# Altium PCB KeyboardControl.PcbDoc
Units mm, origin at the board's own origin, x right, y up, seen from the top; angles counter-clockwise.
Board outline 68 x 22 mm, 2 copper layers (Top Layer, Bottom Layer), stack 1.4 mm thick; 18 components, 35 nets, 131 pads, 58 vias.
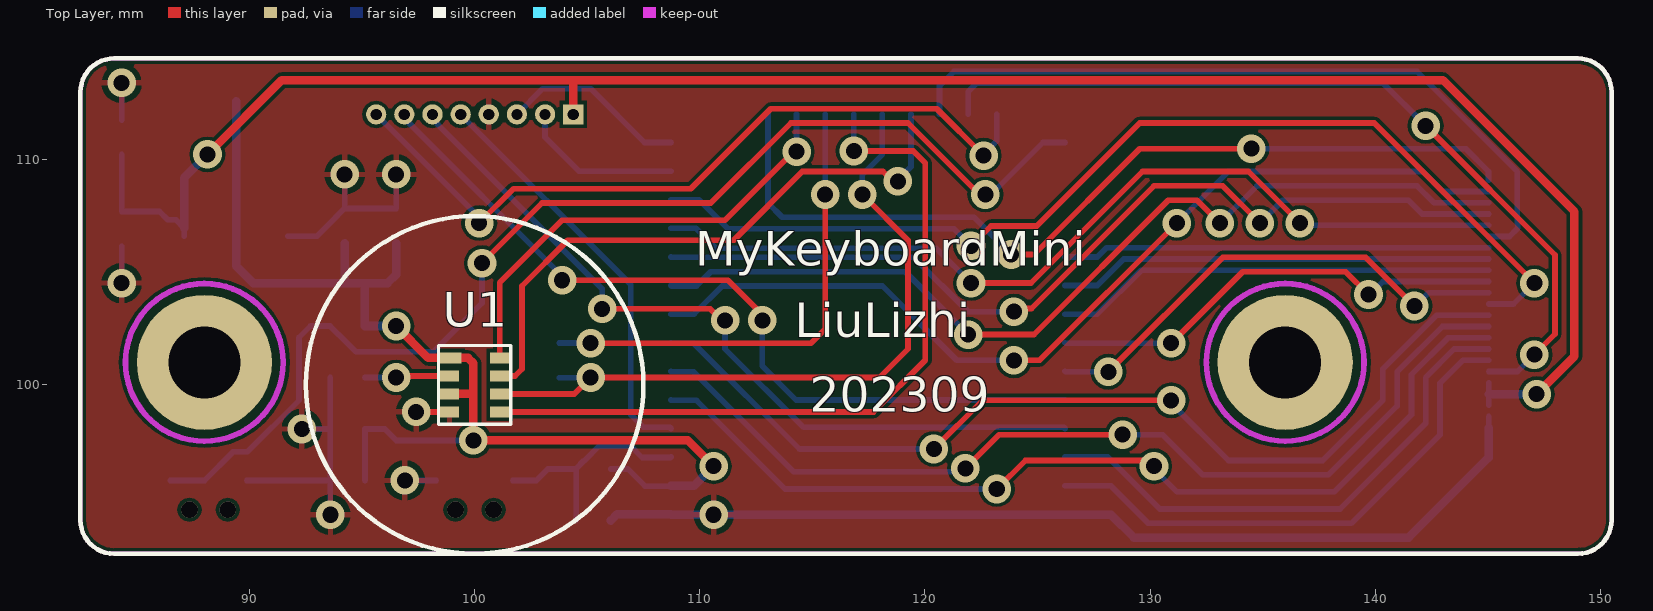
[diagram p0: Top Layer view]
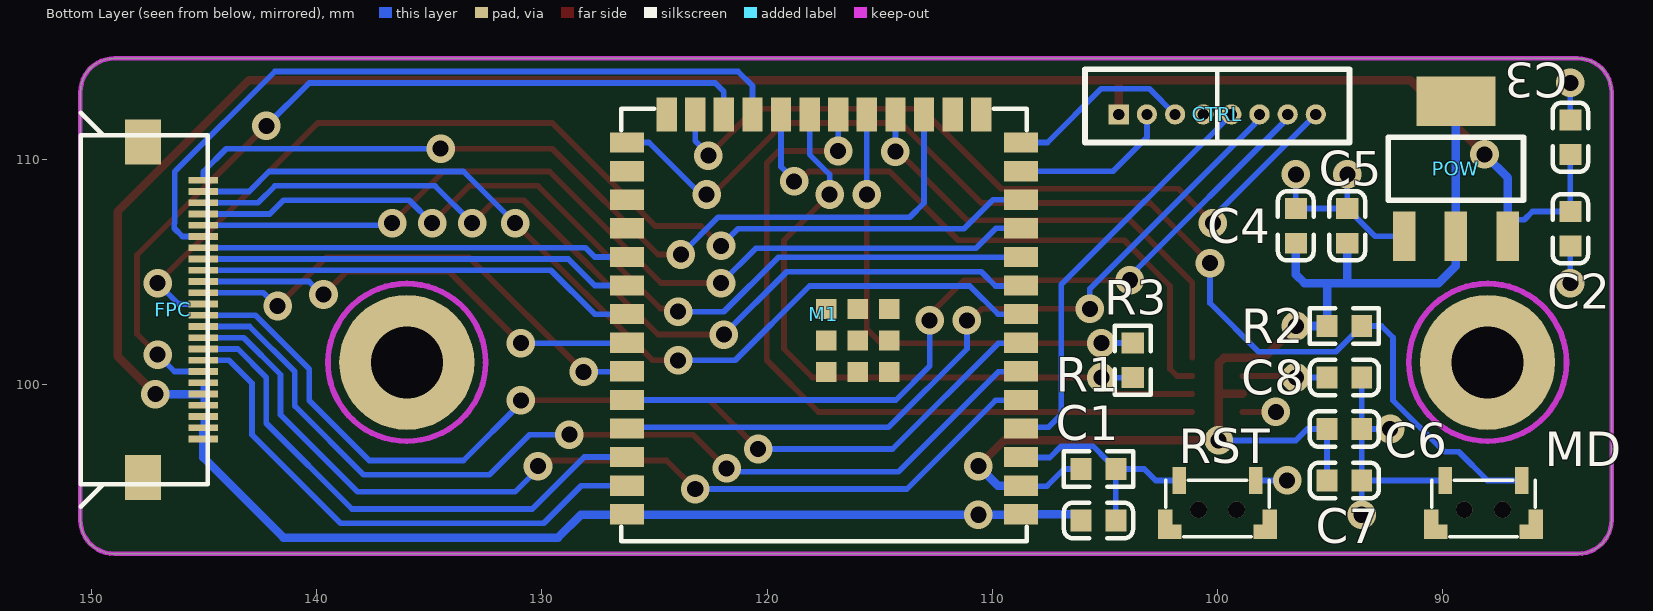
[diagram p1: Bottom Layer view, seen from below]
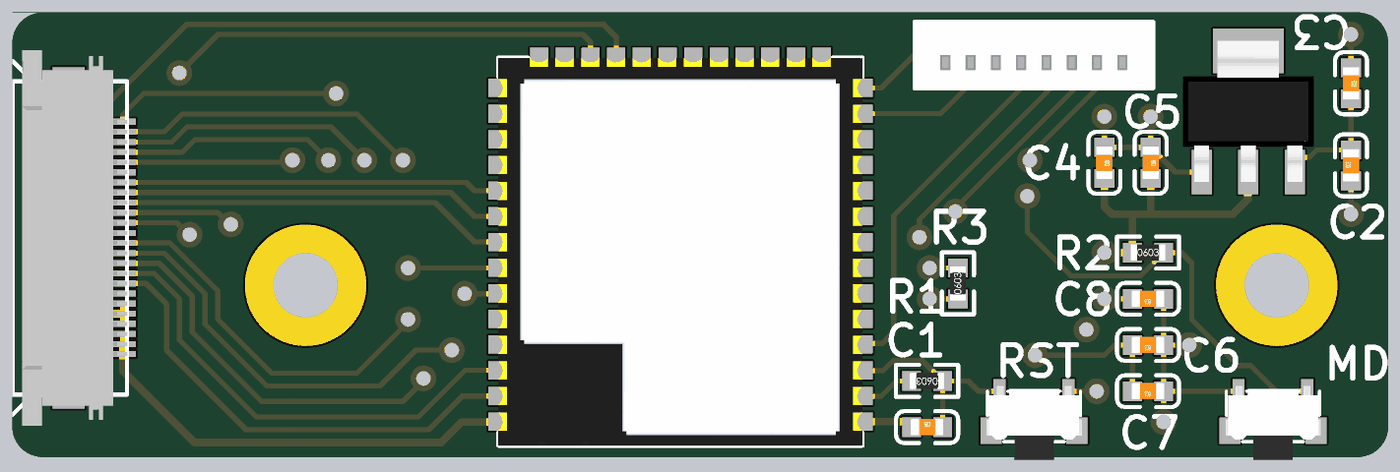
[diagram p2: 3D render of the assembled board from below, using the file's embedded part models]

## Layer stack, top to bottom
Top Solder: solder mask 0.1, Solder Resist, Dk 3.5
Top Layer: signal copper 0.2
Dielectric 1: dielectric 1, FR-4, Dk 4.8
Bottom Layer: signal copper 0.2
Bottom Solder: solder mask 0.1, Solder Resist, Dk 3.5

## Board outline
83.995,92.5 cw(c83.995,94) 82.495,94 82.495,113 cw(c83.995,113) 83.995,114.5 148.995,114.5 cw(c148.995,113) 150.495,113 150.495,94 cw(c148.995,94) 148.995,92.5

## Design rules (kind name [scope] priority, off if disabled: settings)
Clearance [All] p1: gap=0.152 ignorepadtopadclearanceinfootprint=FALSE
PolygonConnect [All] p1: connectstyle=Relief reliefconductorwidth=0.254 reliefentries=4 polygonreliefangle="90 Angle" airgapwidth=0.254
RoutingVias [All] p1: holewidth=0.711 width=1.27 viastyle="Through Hole" minholewidth=0.711 minwidth=1.27 maxholewidth=0.711 maxwidth=1.27
SolderMaskExpansion [All] p1: expansion=0.102 istentingtop=FALSE
Width [All] p1: maxlimit=0.508 minlimit=0.254 preferedwidth=0.254
30 further rules are at their usual default settings.

## Components (designator, comment, footprint, x,y, rotation, side; value= is the part's Value field where it differs from the comment)
C1 "1uF" 0603 105.283,93.98 r180 bottom
C2 "10uF" 0603 84.328,106.934 r90 bottom
C3 "104" 0603 84.328,110.998 r270 bottom
C4 "104" 0603 96.52,107.061 r270 bottom
C5 "10uF" 0603 94.234,107.061 r270 bottom
C6 "0.1uF" 0603 94.361,98.044 r0 bottom
C7 "10uF" 0603 94.361,95.758 r0 bottom
C8 "4.7uF" 0603 94.361,100.33 r0 bottom
CTRL "SH1.25mm_8P" SH1.25MM_8P 95.631,112.014 r0 bottom locked
FPC "FPC_0.5_24P" FPC_0.5_24PIN 145.034,109.093 r270 bottom locked
M1 "ESP32_S3_WROOM_1U_N16R8" ESP32_S3_WROOM_1U 110.49,112.014 r0 bottom locked
MD "KEY" KEY_SMT_4_L 86.487,95.758 r0 bottom locked
POW "3V3" SOT223 89.408,109.601 r270 bottom locked
R1 "10K" R_0603 105.283,96.266 r0 bottom
R2 "10K" R_0603 94.361,102.616 r180 bottom
R3 "3.3K" R_0603 103.759,101.092 r90 bottom
RST "KEY" KEY_SMT_4_L 98.298,95.758 r0 bottom locked
U1 "PAT9125EL" PAT9125EL 100,100 r0 top locked

## Footprints (in the part's own frame and the unit in brackets; to place one, negate y for a bottom-side part, rotate by r counter-clockwise, add the part's x,y. Pads: shape width x height; smd on the part's side, far side on the other; paste and mask are expansions set on the pad)
0603 [mm]
  rect 0.93x0.98 smd: 1(-0.77,0) 2(0.77,0)
  silkscreen extent -1.53,-0.79 1.54,0.79, body extent -0.8,-0.4 0.8,0.4, height 0.3
ESP32_S3_WROOM_1U [mm]
  rect 0.9x0.9 smd: 0(4.085,8.64) 0(4.085,10.04) 0(4.085,11.44) 0(5.485,8.64) 0(5.485,10.04) 0(5.485,11.44) 0(6.885,8.64) 0(6.885,10.04) 0(6.885,11.44)
  rect 1.5x0.9 smd: 1(-1.765,17.76) 2(-1.765,16.49) 3(-1.765,15.22) 4(-1.765,13.95) 5(-1.765,12.68) 6(-1.765,11.41) 7(-1.765,10.14) 8(-1.765,8.87) 9(-1.765,7.6) 10(-1.765,6.33) 11(-1.765,5.06) 12(-1.765,3.79) 13(-1.765,2.52) 14(-1.765,1.25) 27(15.735,1.25) 28(15.735,2.52) 29(15.735,3.79) 30(15.735,5.06) 31(15.735,6.33) 32(15.735,7.6) 33(15.735,8.87) 34(15.735,10.14) 35(15.735,11.41) 36(15.735,12.68) 37(15.735,13.95) 38(15.735,15.22) 39(15.735,16.49) 40(15.735,17.76)
  rect 0.9x1.5 smd: 15(0,0) 16(1.27,0) 17(2.54,0) 18(3.81,0) 19(5.08,0) 20(6.35,0) 21(7.62,0) 22(8.89,0) 23(10.16,0) 24(11.43,0) 25(12.7,0) 26(13.97,0)
  silkscreen extent -2.01,-0.25 15.98,18.95, body extent -2.01,-0.25 16.01,18.96, height 3
FPC_0.5_24PIN [mm]
  rect 2x1.6 smd: 0(-1.7,-2.68) 0(13.2,-2.68)
  rect 0.3x1.3 smd: 1(0,0) 2(0.5,0) 3(1,0) 4(1.5,0) 5(2,0) 6(2.5,0) 7(3,0) 8(3.5,0) 9(4,0) 10(4.5,0) 11(5,0) 12(5.5,0) 13(6,0) 14(6.5,0) 15(7,0) 16(7.5,0) 17(8,0) 18(8.5,0) 19(9,0) 20(9.5,0) 21(10,0) 22(10.5,0) 23(11,0) 24(11.5,0)
  silkscreen extent -3,-5.45 14.5,0.2, body extent -3.55,-4.98 15.05,0.23, height 2
KEY_SMT_4_L [mm]
  rect 0.65x1.3 smd: 0(-0.625,1.95) 0(4.025,1.95)
  rect 0.4x0.65 smd: 0(-0.1,2.275) 0(3.5,2.275)
  rect 0.6x1.2 smd: 1(0,0) 2(3.4,0)
  silkscreen extent -0.6,0 4,2.5, body extent -0.66,-0.26 4.04,3.39, height 1.9
PAT9125EL [mm]
  rect 0.95x0.5 smd: 1(-1.065,1.2)
  rect 0.85x0.5 smd: 2(-1.115,0.4) 3(-1.115,-0.4) 4(-1.115,-1.2) 5(1.115,-1.2) 6(1.115,-0.4) 7(1.115,0.4) 8(1.115,1.2)
  silkscreen extent -1.6,-1.75 1.6,1.75, body extent -1.6,-1.75 1.6,1.75, height 1
R_0603 [mm]
  rect 0.93x0.98 smd: 1(-0.77,0) 2(0.77,0)
  silkscreen extent -1.53,-0.79 1.54,0.79, body extent -0.85,-0.4 0.85,0.4, height 0.56
SH1.25MM_8P [mm]
  rect 0.9x0.9 hole 0.5: 1(8.75,0)
  round 0.9 hole 0.5: 2(7.5,0) 3(6.25,0) 4(5,0) 5(3.75,0) 6(2.5,0) 7(1.25,0) 8(0,0)
  silkscreen extent -1.5,-2 10.25,1.25, body extent -1.5,-1.95 10.25,1.25, height 4.7
SOT223 [mm]
  rect 2.2x1 smd: 1(3,-2.3) 2(3,0) 3(3,2.3)
  rect 2.2x3.5 smd: 2(-3,0)
  silkscreen extent -1.4,-3 1.4,3, body extent -3.49,-3.24 3.49,3.24, height 1.64

## Part data
C1 C2 C3 C4 C5 C6 C7 C8: library part CAP_0603, "贴片电容 0603"
CTRL: "SH"
FPC: "FPC 0.5 24Pin"
M1: library part ESP32_S3_WROOM_1U, "ESP32 S3模组"
MD RST: library part KEY_SMT_4_L, "卧式贴片按键 2*4*3.5mm"
POW: library part LDO_AMS1117, "线性稳压器"
R1 R2 R3: library part RES_0603, "电阻 0603"
U1: "Optical Tracking Miniature Chip"

## Free pads (board coordinates)
  round 6 hole 3.2: 0(88,101) 0(136,101)

## Via types
v1: diameter 1.27, hole 0.711, Top Layer to Bottom Layer, tented both sides, 54 vias
v2: diameter 0.75, hole 0.75, Top Layer to Bottom Layer, 4 vias

## Nets (pads, with @x,y where several pads share a name; then routed paths per layer and width w, separated by ;. In a path a pad name is that pad's centre, name@x,y a point inside that pad or via, vN(x,y) a via of type N, cw(c..) or ccw(c..) an arc to the next point about the centre after c; other vN are vias at no path point)
3V3: C4.2 C5.2 C6.2 C7.2 M1.2 POW.2 R1.2 R2.1 U1.1 U1.3 | length 53.7
  Top Layer w0.381: v1(96.52,102.616) 97.936,101.2 99.714,101.2 99.949,100.965 99.949,99.6 ; U1.3 99.949,99.6 ; v1(110.617,96.393) 109.474,97.536 v1(99.949,97.536) 99.949,99.6
  Bottom Layer w0.254: POW.2@89.408,106.601 POW.2@89.422,106.587 ; 95.123,104.521 95.131,104.513 ; C7.2 C6.2 96.012,98.044 96.52,97.536 v1(99.949,97.536) ; R1.2 106.807,96.266 107.569,95.504 108.705,95.504 M1.2
  Bottom Layer w0.381: POW.2@89.408,106.601 POW.2@89.408,112.601 ; POW.2@89.422,106.587 89.422,105.269 90.17,104.521 94.234,104.521 ; C5.2 94.234,104.521 ; 95.131,104.513 R2.1 v1(96.52,102.616) ; C4.2 96.52,104.902 96.139,104.521 94.234,104.521 ; M1.2 109.748,95.524 v1(110.617,96.393)
5V: C2.2 C3.2 CTRL.1 FPC.19 FPC.20 FPC.21 POW.3 | length 87.6
  Top Layer w0.381: v1(88.138,110.236) 91.44,113.538 104.381,113.538 143.002,113.538 148.844,107.696 148.844,101.269 v1(147.168,99.593) ; CTRL.1 104.381,113.525 104.394,113.538
  Bottom Layer w0.254: C3.2 C2.2 86.005,107.704 86.376,107.333 86.735,107.333 87.108,106.96 POW.3 ; FPC.21 FPC.20 FPC.19
  Bottom Layer w0.381: POW.3@87.108,106.96 87.108,109.206 v1(88.138,110.236) ; FPC.20 v1(147.168,99.593)
BAT_ADC: CTRL.5 M1.4 | length 18.5
  Bottom Layer w0.254: CTRL.5 106.934,104.461 106.934,98.679 107.008,98.605 107.489,98.124 108.665,98.124 M1.4
COL0: FPC.1 M1.17 | length 39.6
  Top Layer w0.254: v1(123.825,105.791) 124.841,105.791 129.54,110.49 v1(134.493,110.49)
  Bottom Layer w0.254: M1.17 113.03,108.077 113.665,107.442 122.174,107.442 v1(123.825,105.791) ; v1(134.493,110.49) 144.018,110.49 145.033,109.475 145.033,109.116 145.034,109.115 FPC.1
COL1: FPC.2 M1.8 | length 42
  Top Layer w0.254: v1(123.952,101.092) 125.095,101.092 v1(131.191,107.188)
  Bottom Layer w0.254: M1.8 109.748,103.144 110.998,104.394 118.11,104.394 121.412,101.092 v1(123.952,101.092) ; v1(131.191,107.188) 133.477,109.474 142.113,109.474 142.994,108.593 FPC.2
COL2: FPC.3 M1.9 | length 41.6
  Top Layer w0.254: v1(121.92,102.235) 124.841,102.235 130.81,108.204 132.08,108.204 v1(133.096,107.188)
  Bottom Layer w0.254: M1.9 108.745,104.394 109.855,104.394 110.49,105.029 119.126,105.029 v1(121.92,102.235) ; v1(133.096,107.188) 134.747,108.839 141.859,108.839 142.605,108.093 FPC.3
COL3: FPC.4 M1.10 | length 41
  Top Layer w0.254: v1(123.952,103.251) 124.099,103.398 124.734,103.398 130.175,108.839 133.223,108.839 v1(134.874,107.188)
  Bottom Layer w0.254: M1.10 108.745,105.664 119.507,105.664 121.92,103.251 v1(123.952,103.251) ; v1(134.874,107.188) 135.89,108.204 141.478,108.204 142.089,107.593 FPC.4
COL4: FPC.5 M1.11 | length 40.4
  Top Layer w0.254: v1(122.047,104.521) 124.714,104.521 129.667,109.474 134.366,109.474 v1(136.652,107.188)
  Bottom Layer w0.254: M1.11 109.835,106.954 110.719,106.07 120.498,106.07 v1(122.047,104.521) ; v1(136.652,107.188) 136.747,107.093 FPC.5
COL5: FPC.6 M1.23 | length 33
  Bottom Layer w0.254: M1.23 120.65,113.284 121.285,113.919 141.859,113.919 146.304,109.474 146.304,107.188 146.326,107.166 146.326,106.956 145.963,106.593 FPC.6
COL6: FPC.7 M1.31 | length 19
  Bottom Layer w0.254: M1.31 127.655,105.684 128.064,106.093 FPC.7
COL7: FPC.8 M1.32 | length 19.3
  Bottom Layer w0.254: M1.32 127.655,104.414 128.834,105.593 FPC.8
COL8: FPC.9 M1.33 | length 19.6
  Bottom Layer w0.254: M1.33 127.655,103.144 129.604,105.093 FPC.9
COL9: FPC.10 M1.34 | length 20.8
  Top Layer w0.254: v1(130.937,101.854) 134.112,105.029 138.684,105.029 v1(139.7,104.013)
  Bottom Layer w0.254: M1.34 126.245,101.854 v1(130.937,101.854) ; v1(139.7,104.013) 139.766,104.013 140.346,104.593 FPC.10
COLA: FPC.11 M1.35 | length 22.1
  Top Layer w0.254: v1(128.143,100.584) 133.223,105.664 139.573,105.664 v1(141.732,103.505)
  Bottom Layer w0.254: M1.35 126.245,100.584 v1(128.143,100.584) ; v1(141.732,103.505) 141.782,103.505 142.37,104.093 FPC.11
GND: C1.1 C2.1 C3.1 C4.1 C5.1 C6.1 C7.1 C8.1 CTRL.4 FPC.22 FPC.23 FPC.24 M1.1 M1.40 MD.2 POW.1 RST.1 U1.4 | length 68.4
  Top Layer w0.254: v1(97.409,98.806) 97.415,98.8 U1.4
  Bottom Layer w0.254: v1(84.328,104.521) C2.1 ; C3.1 v1(84.328,113.411) ; MD.2 C7.1 ; POW.1 93.004,106.601 93.871,107.468 93.871,107.493 94.209,107.831 C5.1 ; v1(92.329,98.044) C6.1 ; C8.1 C6.1 ; v1(93.599,94.234) 93.591,94.242 C7.1 ; v1(94.234,109.347) C5.1 ; v1(96.52,109.347) C4.1 C5.1 ; v1(96.901,95.758) RST.1 ; M1.40 M1.40@126.245,94.234 ; FPC.23 FPC.22 ; C7.1 C6.1
  Bottom Layer w0.381: C1.1 106.327,94.254 M1.1 ; M1.1@108.745,94.234 M1.40@126.205,94.234 ; M1.40@126.245,94.234 128.27,94.234 129.286,93.218 141.478,93.218 145.034,96.774 FPC.24 FPC.23
  other v1: 110.617,94.234
INT: M1.22 U1.7 | length 27
  Top Layer w0.254: U1.7 101.797,100.4 102.108,100.711 102.108,104.394 104.14,106.426 111.506,106.426 114.554,109.474 118.14,109.474 118.573,109.041 v1(118.797,109.041)
  Bottom Layer w0.254: v1(118.797,109.041) 118.797,109.101 119.38,109.684 M1.22
IO48: CTRL.8 M1.25 | length 34.2
  Top Layer w0.254: v1(100.203,107.188) 101.727,108.712 109.601,108.712 113.157,112.268 120.523,112.268 v1(122.607,110.184)
  Bottom Layer w0.254: CTRL.8 100.203,107.442 v1(100.203,107.188) ; v1(122.607,110.184) 122.607,110.244 123.19,110.827 M1.25
MISO: M1.21 R3.1 U1.6 | length 32
  Top Layer w0.254: U1.6 104.426,99.6 v1(105.156,100.33) 117.983,100.33 119.253,101.6 119.253,106.426 v1(117.221,108.458)
  Bottom Layer w0.254: R3.1 105.148,100.322 v1(105.156,100.33) ; v1(117.221,108.458) 117.221,109.347 118.11,110.236 M1.21
MOSI: M1.19 R3.2 | length 21.6
  Top Layer w0.254: v1(105.156,101.854) 114.935,101.854 115.57,102.489 v1(115.57,108.458)
  Bottom Layer w0.254: R3.2 105.148,101.862 v1(105.156,101.854) ; v1(115.57,108.458) M1.19
NCS: M1.18 U1.8 | length 20.6
  Top Layer w0.254: U1.8 101.115,104.544 103.886,107.315 111.125,107.315 114.173,110.363 v1(114.3,110.363)
  Bottom Layer w0.254: v1(114.3,110.363) M1.18
NetC1_2: C1.2 M1.3 R1.1 RST.2 | length 10.2
  Bottom Layer w0.254: RST.2 102.743,95.758 103.251,96.266 R1.1 ; C1.2 R1.1 ; M1.3 108.705,96.774 107.442,96.774 106.934,97.282 105.529,97.282 104.876,96.629 104.851,96.629 104.513,96.291 R1.1
NetC8_2: C8.2 U1.2 | length 3.8
  Top Layer w0.254: v1(96.52,100.33) 96.59,100.4 U1.2
  Bottom Layer w0.254: C8.2 v1(96.52,100.33)
NetM1_27: M1.27 MD.1 R2.2 | length 52.2
  Top Layer w0.254: v1(100.33,105.41) 102.997,108.077 110.49,108.077 114.046,111.633 119.253,111.633 122.428,108.458 v1(122.682,108.458)
  Bottom Layer w0.254: MD.1 88.011,95.758 89.281,97.028 89.916,97.028 92.202,99.314 92.202,102.108 92.71,102.616 R2.2 93.591,102.591 93.929,102.253 93.954,102.253 94.734,101.473 98.171,101.473 100.33,103.632 v1(100.33,105.41) ; v1(122.682,108.458) 122.936,108.458 125.242,110.764 M1.27
RGB: FPC.18 M1.24 | length 37.5
  Top Layer w0.254: v1(142.24,111.506) 147.98,105.766 147.98,102.26 v1(147.066,101.346)
  Bottom Layer w0.254: M1.24 121.92,113.03 122.301,113.411 140.335,113.411 v1(142.24,111.506) ; FPC.18 146.313,100.593 v1(147.066,101.346)
ROW0: FPC.17 M1.39 | length 23.8
  Bottom Layer w0.254: M1.39 128.25,95.524 129.921,93.853 138.938,93.853 142.875,97.79 142.875,100.076 143.892,101.093 FPC.17
ROW1: FPC.16 M1.38 | length 23.9
  Bottom Layer w0.254: M1.38 128.123,96.794 130.429,94.488 138.43,94.488 142.24,98.298 142.24,100.33 143.503,101.593 FPC.16
ROW2: FPC.15 M1.5 | length 43
  Top Layer w0.254: v1(123.19,95.377) 124.46,96.647 129.646,96.647 129.9,96.393 v1(130.175,96.393)
  Bottom Layer w0.254: M1.5 108.745,99.314 109.855,99.314 113.792,95.377 v1(123.19,95.377) ; v1(130.175,96.393) 130.175,96.266 131.191,95.25 138.176,95.25 141.605,98.679 141.605,100.457 143.241,102.093 FPC.15
ROW3: FPC.14 M1.6 | length 43.2
  Top Layer w0.254: v1(121.793,96.291) 123.292,97.79 v1(128.778,97.79)
  Bottom Layer w0.254: M1.6 108.745,100.584 109.728,100.584 114.173,96.139 121.641,96.139 v1(121.793,96.291) ; v1(128.778,97.79) 130.556,97.79 132.334,96.012 137.922,96.012 140.97,99.06 140.97,100.584 142.979,102.593 FPC.14
ROW4: FPC.13 M1.7 | length 43.8
  Top Layer w0.254: v1(120.396,97.155) 122.555,99.314 v1(130.937,99.314)
  Bottom Layer w0.254: M1.7 108.745,101.854 109.728,101.854 114.427,97.155 v1(120.396,97.155) ; v1(130.937,99.314) 130.937,99.187 133.477,96.647 137.668,96.647 140.335,99.314 140.335,100.711 142.717,103.093 FPC.13
ROW5: FPC.12 M1.12 | length 46.8
  Top Layer w0.254: v1(122.047,106.172) 122.936,107.061 124.968,107.061 129.54,111.633 139.954,111.633 v1(147.066,104.521)
  Bottom Layer w0.254: M1.12 109.962,108.224 111.252,106.934 121.285,106.934 v1(122.047,106.172) ; FPC.12 146.138,103.593 v1(147.066,104.521)
SCLK: M1.20 U1.5 | length 33.6
  Top Layer w0.254: U1.5 117.723,98.8 120.015,101.092 120.015,109.855 119.482,110.388 v1(116.84,110.388)
  Bottom Layer w0.254: v1(116.84,110.388) M1.20
U1_RX: CTRL.7 M1.36 | length 36.1
  Top Layer w0.254: v1(103.886,104.648) 111.252,104.648 112.776,103.124 v1(112.776,102.87)
  Bottom Layer w0.254: CTRL.7 96.881,111.839 103.886,104.834 v1(103.886,104.648) ; v1(112.776,102.87) 112.776,100.838 114.28,99.334 M1.36
U1_TX: CTRL.6 M1.37 | length 35.3
  Top Layer w0.254: v1(105.664,103.378) 110.468,103.378 110.976,102.87 v1(111.125,102.87)
  Bottom Layer w0.254: CTRL.6 98.131,111.839 98.358,111.613 98.358,111.573 105.664,104.267 v1(105.664,103.378) ; v1(111.125,102.87) 111.125,101.6 114.606,98.119 126.17,98.119 M1.37
USB_DM: CTRL.2 M1.13 | length 7.2
  Bottom Layer w0.254: CTRL.2 103.124,112.007 103.124,110.998 104.628,109.494 M1.13
USB_DP: CTRL.3 M1.14 | length 8.3
  Bottom Layer w0.254: CTRL.3 103.024,113.157 105.156,113.157 107.549,110.764 M1.14
pads on no net: FPC.0 M1.0 M1.15 M1.16 M1.26 M1.28 M1.29 M1.30 MD.0 RST.0
copper on no net:
  other v2: 87.337,94.458 89.037,94.458 99.148,94.458 100.848,94.458

## Polygon pours and split planes (outlines as drawn)
GND on Top Layer "GND_L01_P000" (solid, remove dead copper, pour order 0): 83.995,92.5 cw(c83.995,94) 82.495,94 82.495,113 cw(c83.995,113) 83.995,114.5 148.995,114.5 cw(c148.995,113) 150.495,113 150.495,94 cw(c148.995,94) 148.995,92.5

## Keep-outs
Top Layer:
  circle w0.254: c136,101 r3.5
  circle w0.254: c88,101 r3.5
  lines w0.2: 82.495,94 ccw(c83.995,94) 83.995,92.5 148.995,92.5 ccw(c148.995,94) 150.495,94 150.495,113 ccw(c148.995,113) 148.995,114.5 83.995,114.5 ccw(c83.995,113) 82.495,113 82.495,94
Bottom Layer:
  circle w0.254: c136,101 r3.5
  circle w0.254: c88,101 r3.5
  lines w0.2: 82.495,94 ccw(c83.995,94) 83.995,92.5 148.995,92.5 ccw(c148.995,94) 150.495,94 150.495,113 ccw(c148.995,113) 148.995,114.5 83.995,114.5 ccw(c83.995,113) 82.495,113 82.495,94

## Silkscreen, mask and mechanical layers (free items; w line width, h text height)
Top Overlay:
  lines w0.2: 82.495,94 ccw(c83.995,94) 83.995,92.5 148.995,92.5 ccw(c148.995,94) 150.495,94 150.495,113 ccw(c148.995,113) 148.995,114.5 83.995,114.5 ccw(c83.995,113) 82.495,113 82.495,94 ; 92.5,100 ccw(c100,100) 100,92.5 ccw(c100,100) 107.5,100 ccw(c100,100) 100,107.5 ccw(c100,100) 92.5,100
  text "MyKeyboardMini" at 109.803,105.283 h1.52
  text "LiuLizhi" at 114.217,102.108 h1.52
  text "202309" at 114.881,98.806 h1.52
Bottom Overlay:
  lines w0.2: 100,110.744 100,114.014